# Allegro board CHOPPING.brd
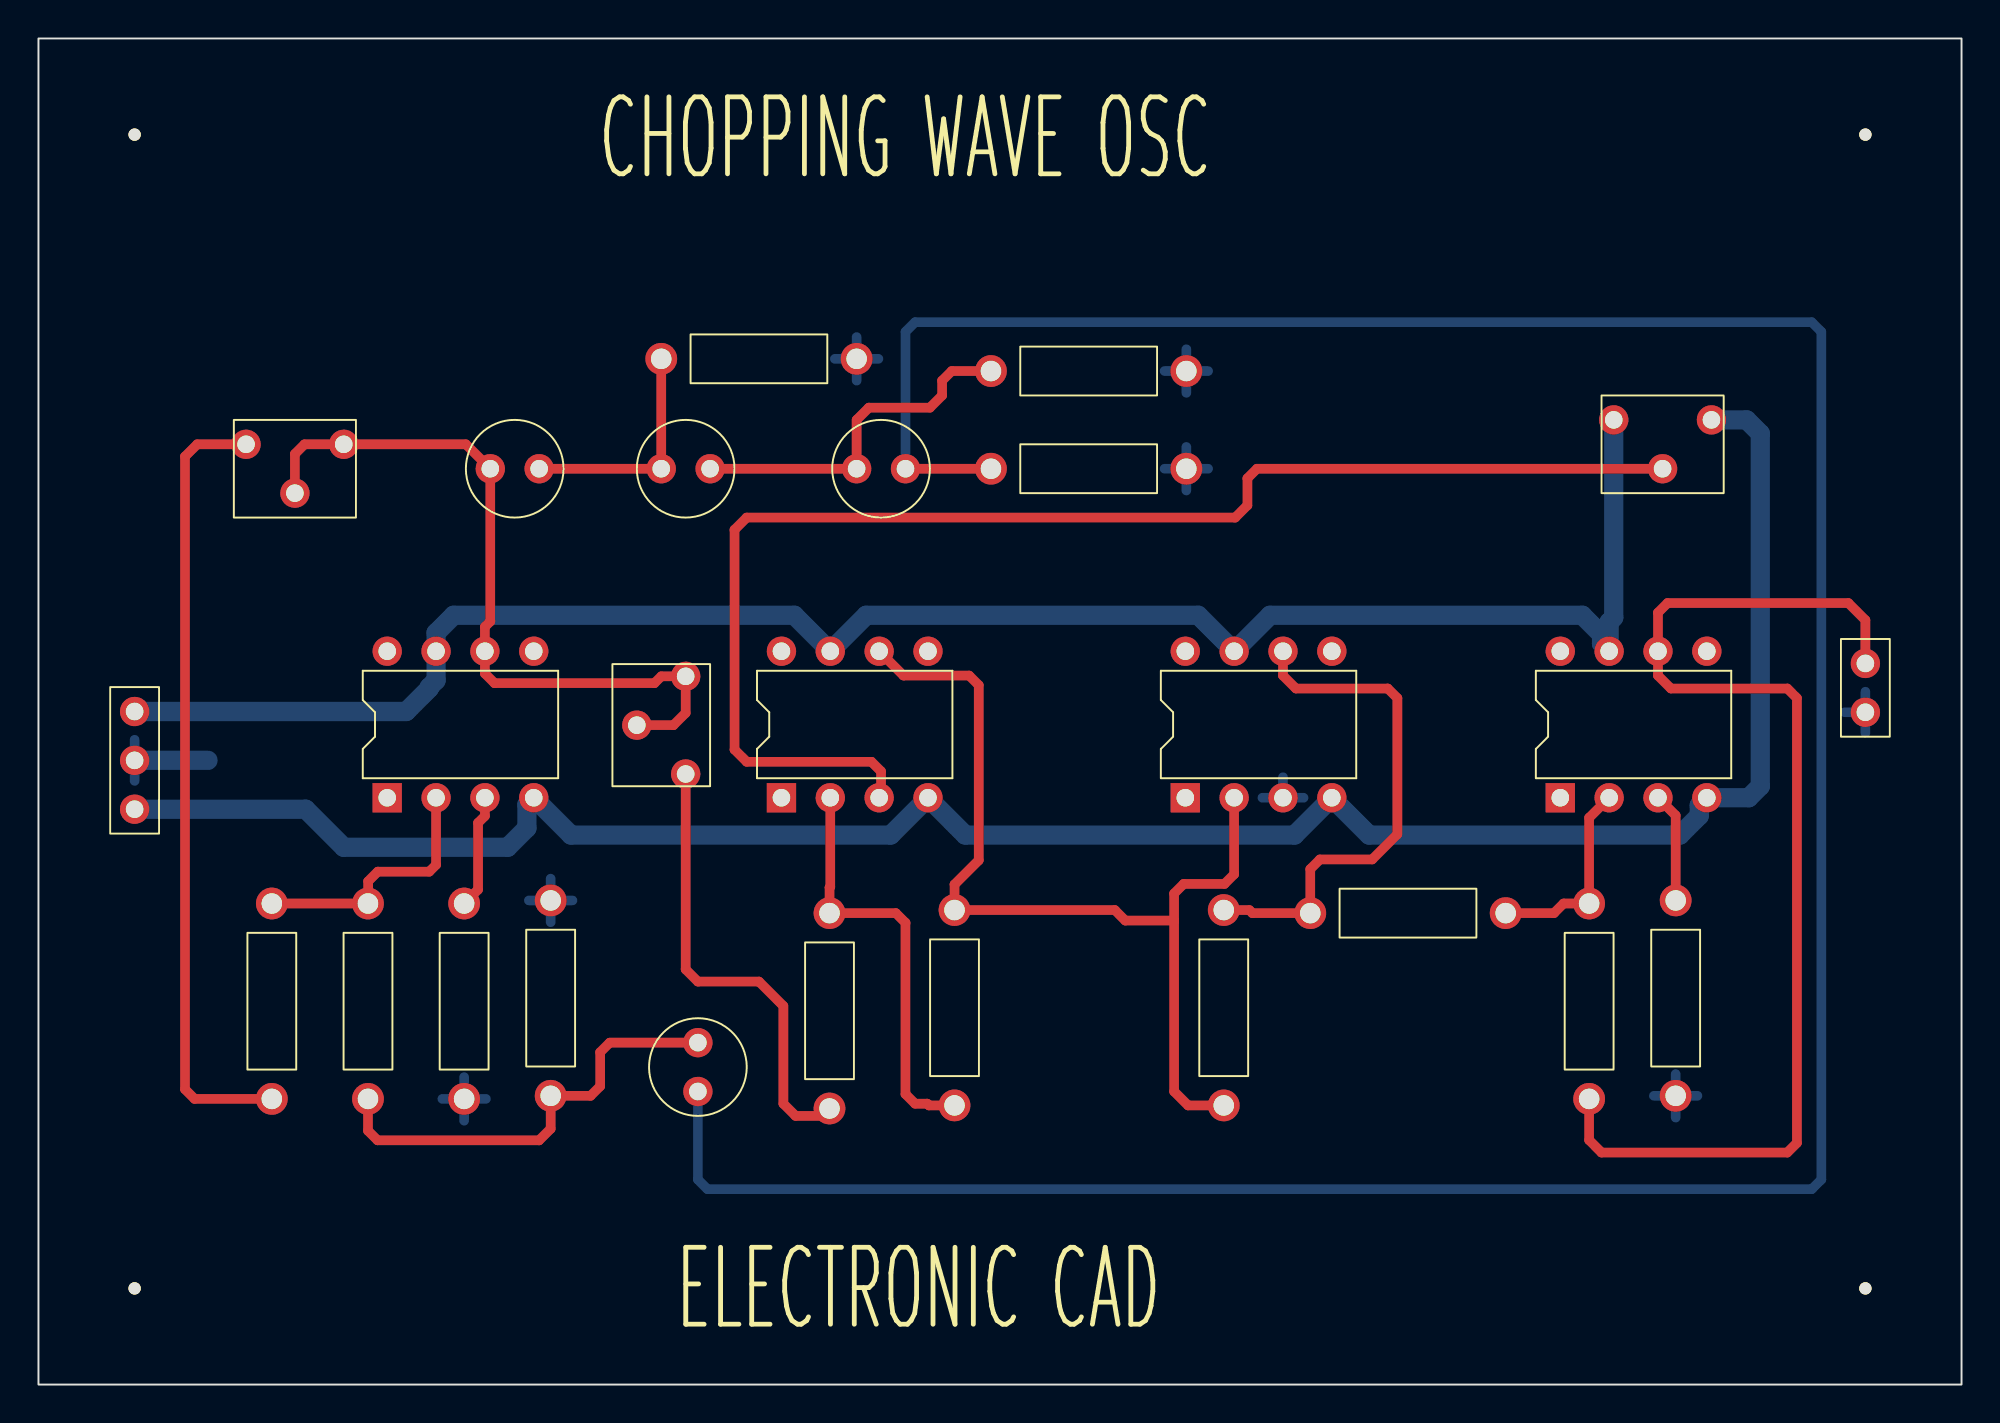
[diagram p0: board, top side]
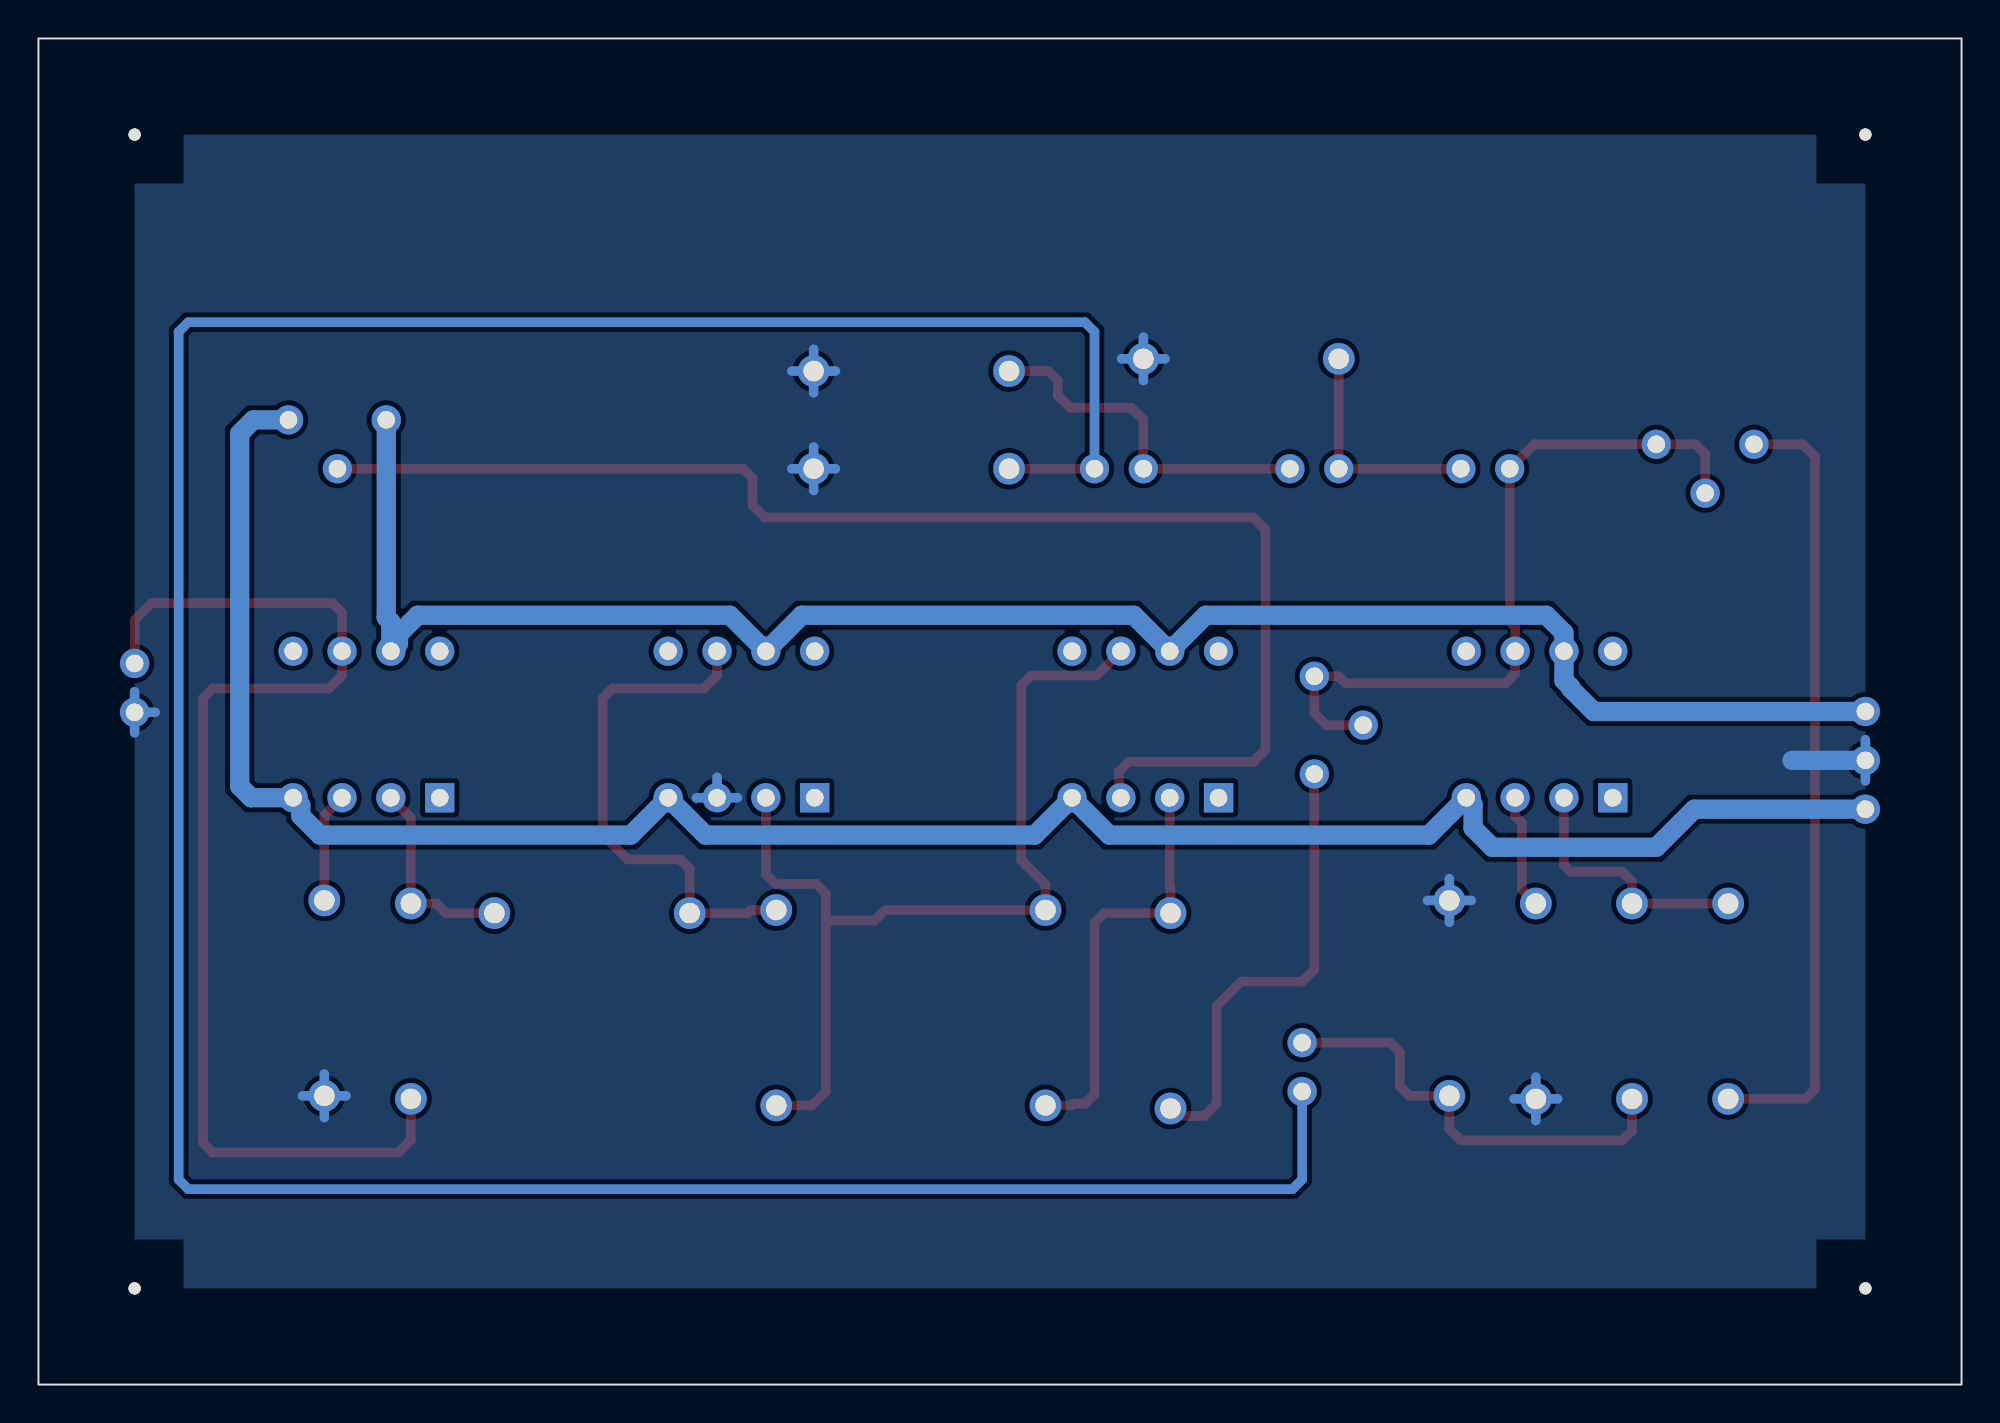
[diagram p1: board, bottom side, seen from below]

Outline 100 x 70 mm; copper layers: TOP, BOTTOM. Coordinates in mm from the lower left corner of the outline.
Outline path: rectangle 0,0 100,70

## Design rules (mm)
constraint set DEFAULT: min track width 0.5
nets with their own width: min track width 1; nets +12V -12V GND

## Placement (name value [footprint] x y rotation side)
C1  0.001uF  [CAP196]  23.5 47.62 270 top
C2  0.001uF  [CAP196]  32.38 47.62 270 top
C3  0.001uF  [CAP196]  42.55 47.62 270 top
C4  0.001uF  [CAP196]  34.29 15.24 0 top
J1  CON3  [JUMPER3]  5 35 270 top
J2  CON2  [JUMPER2]  95 37.5 270 top
NOREF  -  []  5 5 90 top
NOREF#2  -  [unnamed#2]  95 65 0 top
NOREF#3  -  [unnamed#2]  5 65 0 top
NOREF#4  -  [unnamed#2]  95 5 0 top
NOREF#5  -  [unnamed#2]  5 5 0 top
NOREF#6  -  []  5 0 90 top
NOREF#7  -  []  0 0 90 top
NOREF#8  -  []  0 70 0 top
R1  10K  [RES400]  47.63 14.52 0 top
R2  15K  [RES400]  12.13 25.02 180 top
R3  10K  [RES400]  17.14 25.02 180 top
R4  20K  [RES400]  41.13 24.52 180 top
R5  4.7K  [RES400]  32.38 53.34 270 top
R6  4.7K  [RES400]  49.53 52.7 270 top
R7  4.7K  [RES400]  49.53 47.62 270 top
R8  4.7K  [RES400]  26.64 15.02 0 top
R9  1K  [RES400]  22.14 25.02 180 top
R10  8.2K  [RES400]  61.63 14.52 0 top
R11  10K  [RES400]  80.64 25.02 180 top
R12  2.2K  [RES400]  66.14 24.52 270 top
R13  5.1K  [RES400]  85.14 15.02 0 top
U1  LF356  [DIP8_3]  18.14 30.52 90 top
U2  LF356  [DIP8_3]  38.63 30.52 90 top
U3  LF356  [DIP8_3]  59.63 30.52 90 top
U4  LF356  [DIP8_3]  79.14 30.52 90 top
VR1  470K  [RESADJ]  10.79 48.9 90 top
VR2  100K  [RESADJ]  33.66 36.83 0 top
VR3  10K  [RESADJ]  81.92 50.16 90 top

## Library data of the parts
C1-C4 = CAP NP: Tolerance: ***; User Part Number: ***
J1 = CON3: User Part Number: ***
J2 = CON2_1: User Part Number: ***
R1-R13 = R: Tolerance: ***; User Part Number: ***
U1-U4 = LF356_0: Tolerance: ***; User Part Number: ***
VR1-VR3 = POT: Tolerance: ***; User Part Number: ***

## Footprints (pads in the part's own frame, mm; a bottom-side part is the same pattern mirrored in y, then rotated)
CAP196
  round 1.524 hole 0.914: 1(0,0) 2(0,2.54)
DIP8_3
  rect 1.524x1.524 hole 0.914: 1(0,0)
  round 1.524 hole 0.914: 2(0,-2.54) 3(0,-5.08) 4(0,-7.62) 5(7.62,-7.62) 6(7.62,-5.08) 7(7.62,-2.54) 8(7.62,0)
JUMPER2
  round 1.524 hole 0.914: 1(0,0) 2(2.54,0)
JUMPER3
  round 1.524 hole 0.914: 1(0,0) 2(2.54,0) 3(5.08,0)
RES400
  round 1.651 hole 1.067: 1(0,0) 2(0,10.16)
RESADJ
  round 1.524 hole 0.914: 1(0,0) 2(-2.54,-2.54) 3(0,-5.08)
unnamed#2
  round 0.635 hole 3.175 unplated: (0,0)

## Nets
+12V: J1.1 U1.7(V-) U2.7(V-) U3.7(V-) U4.7(V-) VR3.1
-12V: J1.3 U1.4 U2.4 U3.4 U4.4 VR3.3
GND: J1.2 J2.2 R5.2 R6.2 R7.2 R8.2 R9.2 R13.1 U3.3
OUT: J2.1 R11.2 U4.6
SIG: R1.2 R10.1 U2.6 U3.2
N00478: C1.2 C2.1 R5.1
N00486: C1.1 U1.6 VR1.2(WIPER) VR1.3 VR2.1 VR2.2(WIPER)
N00554: C2.2 C3.1 R6.1
N00558: C3.2 C4.1 R7.1
N00562: C4.2 R3.2 R8.1
N00566: R2.1 R3.1 U1.2
N00758: R9.1 U1.3
N00802: R4.2 VR2.3
N00856: R1.1 R4.1 U2.2
N00892: U2.3 VR3.2(WIPER)
N01014: R10.2 R12.1 U3.6
N01091: R11.1 R12.2 U4.2
N01108: R13.2 U4.3
N01817: R2.2 VR1.1

Pads without a net: U1 1 5 8; U2 1 5 8; U3 1 5 8; U4 1 5 8

## Routing (per net, layer and track width the routed paths; a pad name or vN(x,y) marks a point on that pad's centre or on a via; arc(x,y) is an arc through that point)
+12V: length 96.5
  BOTTOM w1: J1.1 19.12,35 20.32,36.2 20.32,36.26 20.68,36.62 U1.7 20.68,39.09 21.59,40.01 39.3,40.01 U2.7 43.05,40.01 60.3,40.01 U3.7 64.05,40.01 80.28,40.01 81.28,39.01 81.28,38.53 U4.7 81.67,39.65 81.92,39.89 VR3.1
-12V: length 113.7
  BOTTOM w1: J1.3 13.89,29.92 15.88,27.94 24.4,27.94 25.4,28.94 25.4,30.16 U1.4 27.7,28.57 44.31,28.57 46.26,30.52 48.2,28.57 65.31,28.57 U3.4 69.19,28.57 85.36,28.57 86.36,29.57 86.36,30.12 U4.4 88.94,30.52 89.53,31.11 89.53,49.46 88.83,50.16 VR3.3
GND: length 39.6
  BOTTOM w0.5: R8.2 26.64,26.31 ; R8.2 25.5,25.18 ; R8.2 26.64,24.04 ; R8.2 27.77,25.18 ; U3.3 64.72,31.58 ; U3.3 65.78,30.52 ; U3.3 63.65,30.52 ; R13.1 85.14,16.15 ; R13.1 85.14,13.88 ; R13.1 84,15.02 ; R13.1 86.27,15.02 ; 5,31.39 J1.2 5,33.53 ; R9.2 23.27,14.86 ; R9.2 21,14.86 ; R9.2 22.14,13.72 ; R9.2 22.14,15.99 ; R7.2 60.82,47.62 ; R7.2 58.56,47.62 ; R7.2 59.69,46.49 ; R7.2 59.69,48.76 ; 41.41,53.34 R5.2 ; R5.2 43.68,53.34 ; R5.2 42.55,54.47 ; R5.2 42.55,52.21 ; 93.93,34.96 J2.2 ; J2.2 95,33.89 ; J2.2 95,36.03 ; R6.2 60.82,52.7 ; R6.2 59.69,51.57 ; R6.2 58.56,52.7 ; R6.2 59.69,53.84
  BOTTOM w1: J1.2 8.81,32.46
OUT: length 61.1
  TOP w0.5: R11.2 80.64,12.71 81.28,12.06 90.94,12.06 91.44,12.57 91.44,35.7 90.94,36.2 84.89,36.2 84.22,36.87 U4.6 84.22,40.14 84.72,40.64 94.11,40.64 95,39.76 J2.1
SIG: length 50.5
  TOP w0.5: 59.05,24.13 59.05,25.54 59.55,26.04 61.67,26.04 62.17,26.54 U3.2 ; 59.05,24.13 59.05,15.24 59.78,14.52 R10.1 ; 59.05,24.13 56.52,24.13 55.97,24.68 R1.2 47.63,26 48.9,27.27 48.9,36.37 48.4,36.87 44.98,36.87 43.72,38.13
N00478: length 12.1
  TOP w0.5: C1.2 C2.1 R5.1
N00486: length 39.2
  TOP w0.5: VR1.2 13.34,48.4 13.84,48.9 VR1.3 22.23,48.9 C1.1 23.5,39.68 23.21,39.4 U1.6 23.21,36.98 23.71,36.48 32.03,36.48 32.39,36.83 VR2.1 33.66,34.92 33.02,34.29 VR2.2
N00554: length 18.6
  TOP w0.5: R6.1 47.49,52.7 46.99,52.2 46.99,51.44 46.35,50.8 43.18,50.8 42.55,50.16 C3.1 C2.2
N00558: length 167.1
  TOP w0.5: C3.2 R7.1
  BOTTOM w0.5: C4.1 34.29,10.66 34.79,10.16 92.21,10.16 92.71,10.66 92.71,54.74 92.21,55.24 45.59,55.24 45.09,54.74 C3.2
N00562: length 23.2
  TOP w0.5: R3.2 17.14,13.2 17.64,12.7 26.04,12.7 26.64,13.3 R8.1 28.71,15.02 29.21,15.52 29.21,17.28 29.71,17.78 C4.2
N00566: length 13.5
  TOP w0.5: U1.2 20.68,27.02 20.32,26.67 17.64,26.67 17.14,26.17 17.14,25.02 R3.1 R2.1
N00758: length 5.9
  TOP w0.5: U1.3 23.21,29.57 22.86,29.21 22.86,25.74 R9.1
N00802: length 23.9
  TOP w0.5: VR2.3 33.66,21.59 34.29,20.95 37.47,20.95 38.73,19.68 38.73,14.61 39.37,13.97 40.75,13.97 R4.2
N00856: length 21.9
  TOP w0.5: U2.2 41.17,25.89 41.13,25.84 R4.1 44.59,24.52 45.09,24.02 45.09,15.11 45.59,14.61 46.22,14.61 46.3,14.52 R1.1
N00892: length 71.3
  TOP w0.5: 43.72,30.52 43.81,30.61 43.81,31.89 43.31,32.38 36.83,32.38 36.2,33.02 36.2,44.45 36.83,45.09 62.23,45.09 62.87,45.72 62.87,47.12 63.37,47.62 VR3.2
N01014: length 26.9
  TOP w0.5: R10.2 62.97,24.68 63.12,24.52 R12.1 66.14,26.8 66.64,27.3 69.35,27.3 70.66,28.62 70.66,35.7 70.16,36.2 65.39,36.2 64.72,36.87 U3.6
N01091: length 10.5
  TOP w0.5: U4.2 80.64,29.48 R11.1 79.31,25.02 78.81,24.52 R12.2
N01108: length 5.7
  TOP w0.5: U4.3 85.14,29.59 R13.2
N01817: length 41.1
  TOP w0.5: VR1.1 8.26,48.9 7.62,48.26 7.62,15.36 8.12,14.86 12.13,14.86

## Copper pours and planes (outline as drawn; the poured copper is in the pictures)
GND on BOTTOM: 95,5 95,65 5,65 5,5

## Text on the board
Ref Des/Silkscreen Top: CHOPPING WAVE OSC | ELECTRONIC CAD
DIMENSION: FIGURE | FINISHED_SIZE | 0.914 | 1.067 | 3.175 | DRILL CHART: TOP to BOTTOM | ALL UNITS ARE IN MILLIMETERS | PLATED | NON-PLATED | QTY | 54 | 26 | 4
